# EAGLE board Sch (EAGLE 7.5.0)
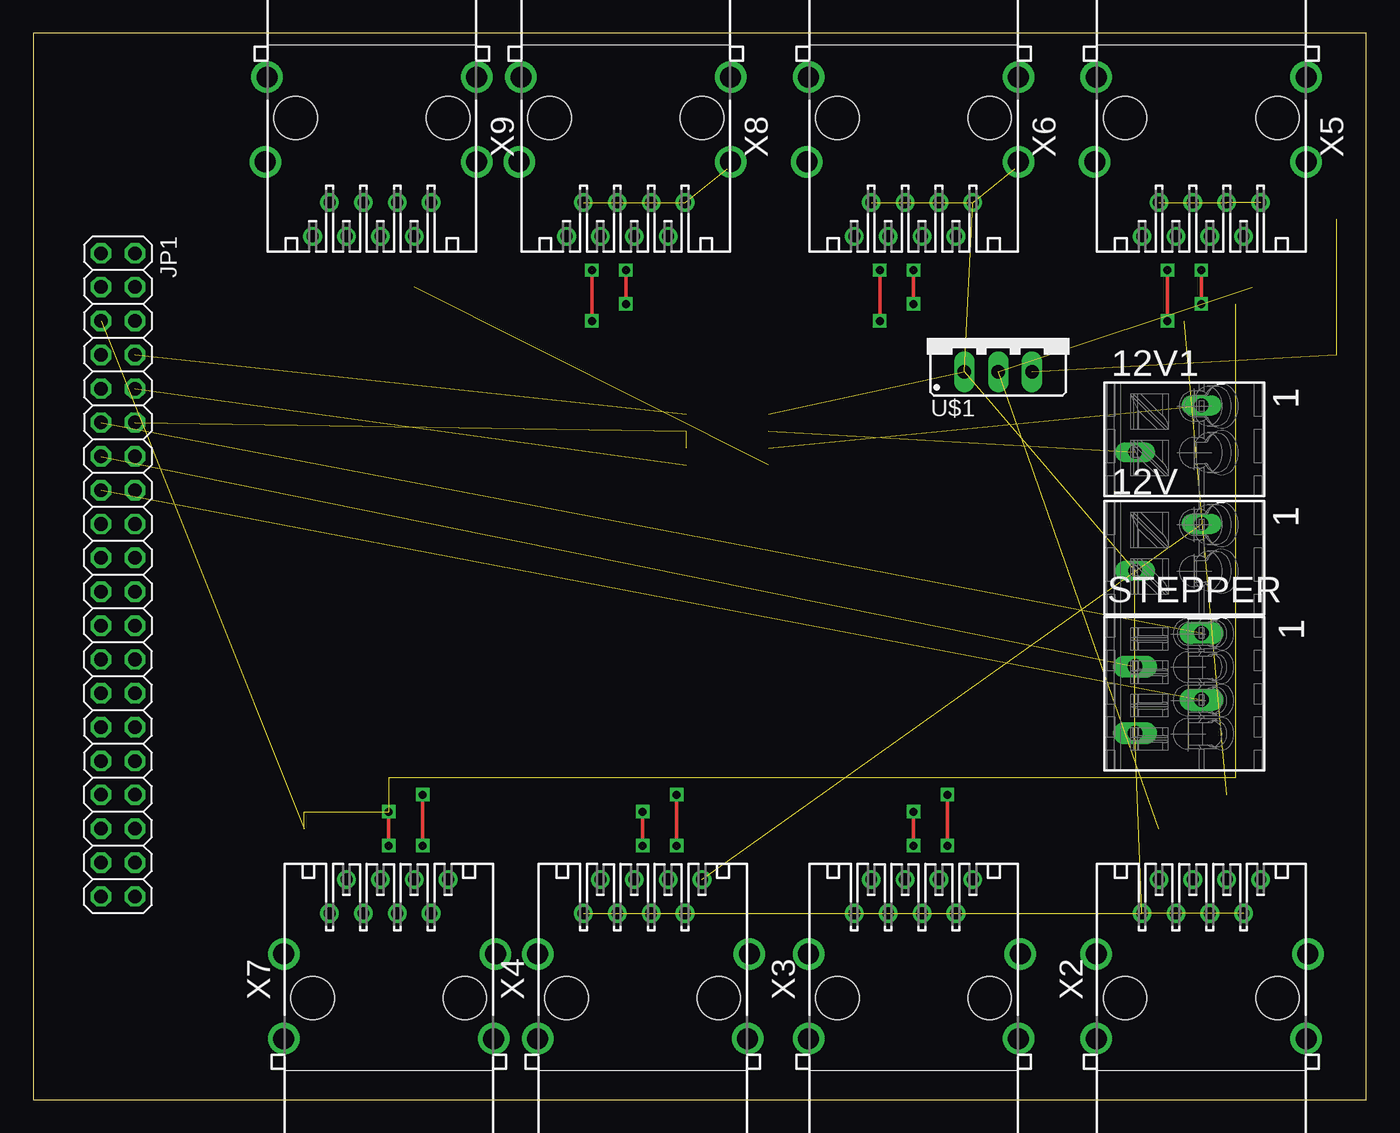
[diagram p0: board, top side]
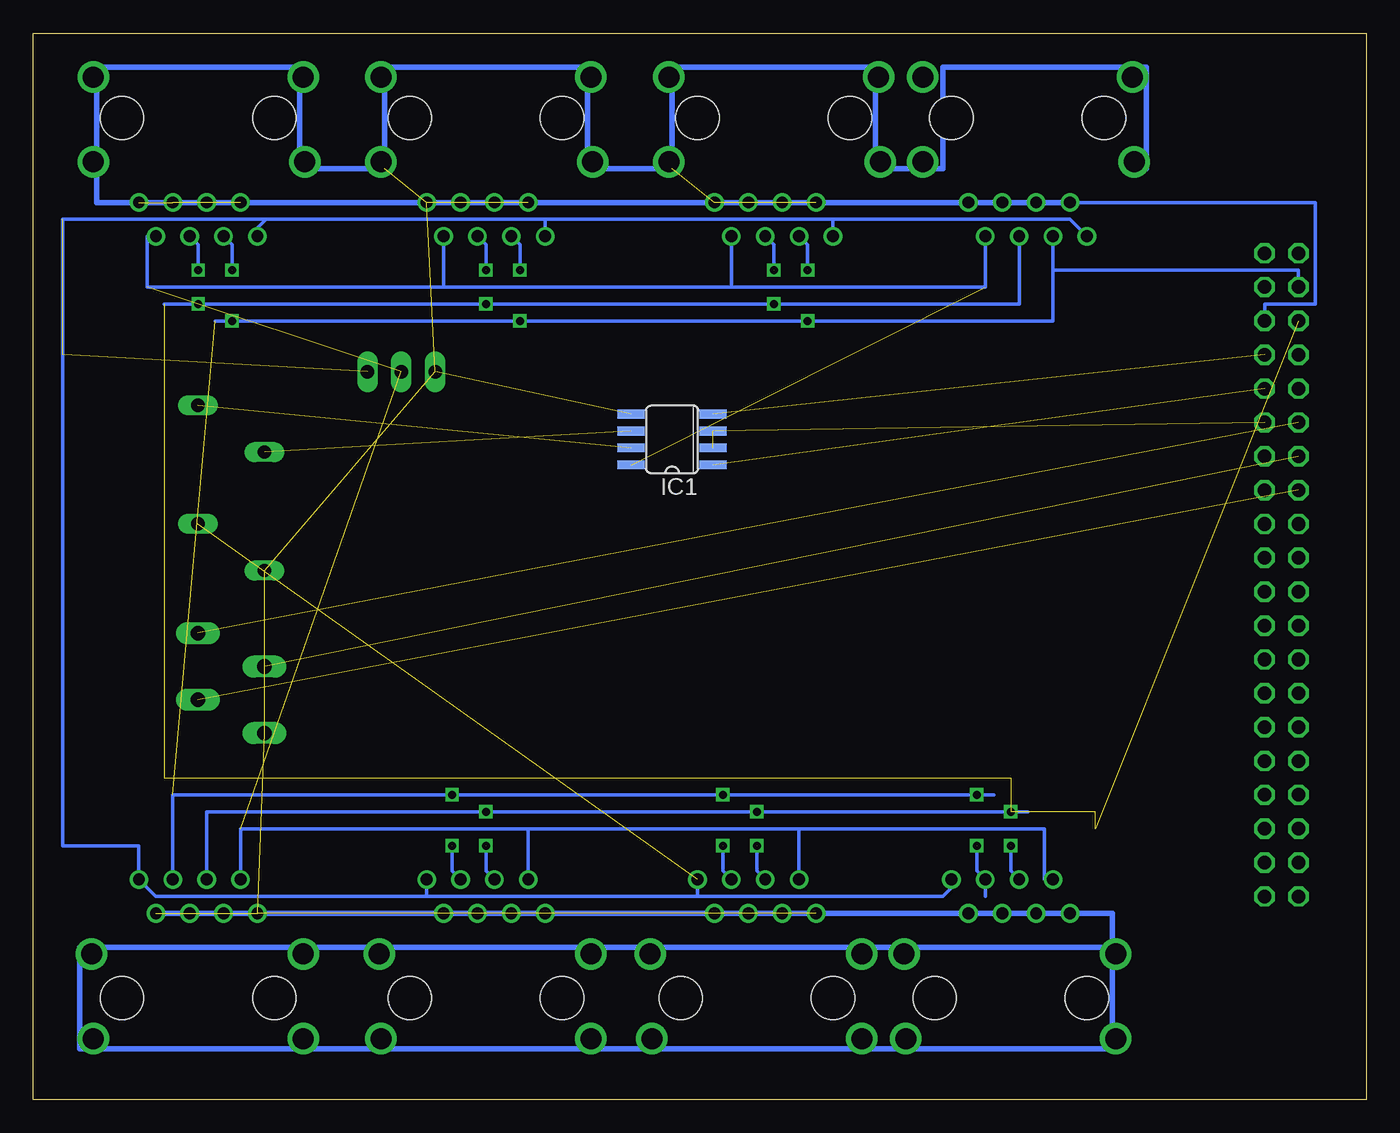
[diagram p1: board, bottom side, seen from below]

Size 100 x 80 mm. Coordinates in mm from the lower left corner, seen from the top.
Outline: 0,0 100,0 100,80 0,80 0,0
Copper layers (1*16): Top 0.035mm / dielectric 1.5mm / Bottom 0.035mm
Design rules "default": minimum track width 10mil, minimum drill 24mil, track to track 8mil, track to pad 8mil, pad to pad 8mil, via to via 8mil, smd to smd 8mil, copper to edge 40mil, drill to drill 8mil, minimum pad ring 10mil, minimum via ring 8mil, stop-mask expansion 4mil, vias tented up to drill 0mil, thermal gap 10mil

## Footprints (pad centres in the part's own frame; a part is rotated, then mirrored left to right if it is on the bottom)
P-250-202 = drill 1 long: L1 1.3,2.55; L2 -3.7,-0.95
SO08 = smd 0.66 x 2.032: 1 -1.905,-3.073; 2 -0.635,-3.073; 3 0.635,-3.073; 4 1.905,-3.073; 5 1.905,3.073; 6 0.635,3.073; 7 -0.635,3.073; 8 -1.905,3.073
2X20 = drill 1.016 octagon: 1 -24.13,-1.27; 2 -24.13,1.27; 3 -21.59,-1.27; 4 -21.59,1.27; 5 -19.05,-1.27; 6 -19.05,1.27; 7 -16.51,-1.27; 8 -16.51,1.27; 9 -13.97,-1.27; 10 -13.97,1.27; 11 -11.43,-1.27; 12 -11.43,1.27; 13 -8.89,-1.27; 14 -8.89,1.27; 15 -6.35,-1.27; 16 -6.35,1.27; 17 -3.81,-1.27; 18 -3.81,1.27; 19 -1.27,-1.27; 20 -1.27,1.27; 21 1.27,-1.27; 22 1.27,1.27; 23 3.81,-1.27; 24 3.81,1.27; 25 6.35,-1.27; 26 6.35,1.27; 27 8.89,-1.27; 28 8.89,1.27; 29 11.43,-1.27; 30 11.43,1.27; 31 13.97,-1.27; 32 13.97,1.27; 33 16.51,-1.27; 34 16.51,1.27; 35 19.05,-1.27; 36 19.05,1.27; 37 21.59,-1.27; 38 21.59,1.27; 39 24.13,-1.27; 40 24.13,1.27
P-250-404 = drill 1.1 long: L1 1.3,4.513; L2 -3.7,2.013; L3 1.3,-0.487; L4 -3.7,-2.987
TO220S = drill 1.016 long: 1 -2.54,-2.54; 2 0,-2.54; 3 2.54,-2.54
RJ45 = drill 0.889: 1 -4.445,6.35; 2 -3.175,8.89; 3 -1.905,6.35; 4 -0.635,8.89; 5 0.635,6.35; 6 1.905,8.89; 7 3.175,6.35; 8 4.445,8.89 | drill 1.575 pad 2.184: G1 -7.874,-3.048; G2 7.874,-3.048; G3 -7.874,3.302; G4 8.001,3.302 | hole 3.251: -5.715,0; 5.715,0

## Placement (x,y rotation side)
12V  250-202  [P-250-202]  86.36,40.64 0 top
12V1  250-202  [P-250-202]  86.36,49.53 0 top
IC1  MAX485CSA  [SO08]  52.07,49.53 90 bottom
JP1  [2X20]  6.35,39.37 270 top
STEPPER  250-404  [P-250-404]  86.36,30.48 0 top
U$1  LM1086TO220V  [TO220S]  72.39,57.15 0 top
X2  [RJ45]  87.63,7.62 0 top
X3  [RJ45]  66.04,7.62 0 top
X4  [RJ45]  45.72,7.62 0 top
X5  [RJ45]  87.63,73.66 180 top
X6  [RJ45]  66.04,73.66 180 top
X7  [RJ45]  26.67,7.62 0 top
X8  [RJ45]  44.45,73.66 180 top
X9  [RJ45]  25.4,73.66 180 top

## Library data of the parts
12V 12V1 STEPPER = con-wago_250
IC1 = andereBauteile
JP1 = pinhead-1
U$1 = v-reg-2
X2-X9 = con-appsys

## Nets
N$1: 12V.L2 IC1.5 JP1.6 STEPPER.L4 U$1.1 X2.1 X2.3 X2.5 X2.7 X3.1 X3.3 X3.5 X3.7 X4.1 X4.3 X4.5 X4.7 X5.1 X5.3 X5.5 X5.7 X6.1 X6.3 X6.5 X6.7 X7.1 X8.1 X8.3 X8.7 X9.7
N$2: JP1.3 X2.6 X3.6 X4.6 X5.6 X6.6 X7.6 X8.6 X9.6
N$3: JP1.5 X2.4 X3.4 X4.4 X5.4 X6.4 X7.4 X8.4 X9.4
N$4: 12V.L1 U$1.3 X2.8 X3.8 X4.8 X5.8 X6.8 X7.8 X8.8 X9.8
N$5: JP1.15 STEPPER.L3
N$6: JP1.11 STEPPER.L1
N$7: JP1.13 STEPPER.L2
N$8: IC1.8 U$1.2 X2.2 X3.2 X4.2 X5.2 X6.2 X7.2 X8.2 X9.2
N$9: IC1.2 IC1.3 JP1.12
N$10: IC1.1 JP1.10
N$11: IC1.4 JP1.8
N$12: 12V1.L2 IC1.6
N$13: 12V1.L1 IC1.7

## Tracks (layer width: path | path; a pad name or v marks a point on that pad's centre or on a via)
N$1  (26 unrouted)
  Bottom 0.254: JP1.6 7.62,59.69 3.81,59.69 3.81,67.31 22.86,67.31
  Bottom 0.406: X2.7 X7.1 19.05,13.97 19.05,11.43 | X9.7 22.86,67.31 X5.1 95.25,67.31 95.25,77.47 80.01,77.47 80.01,69.85 73.66,69.85 73.66,77.47 58.42,77.47 58.42,69.85 52.07,69.85 52.07,77.47 36.83,77.47 36.83,69.85 31.75,69.85 31.75,77.47 16.51,77.47 16.51,69.85 | 19.05,11.43 19.05,3.81 96.52,3.81 96.52,11.43 19.05,11.43
N$2  (via drill 0.6)  (7 unrouted)
  Top 0.254: v41.91,58.42 41.91,62.23 | v63.5,58.42 63.5,62.23 | v85.09,58.42 85.09,62.23 | v48.26,22.86 48.26,19.05 | v29.21,22.86 29.21,19.05 | v68.58,22.86 68.58,19.05
  Bottom 0.254: X9.6 23.5,62.23 | 23.5,62.23 23.5,58.42 v41.91,58.42 v63.5,58.42 v85.09,58.42 86.36,58.42 | X8.6 41.91,64.14 41.91,62.23 | X6.6 63.5,64.14 63.5,62.23 | X5.6 85.09,64.14 85.09,62.23 | X2.6 89.53,22.86 v68.58,22.86 v48.26,22.86 v29.21,22.86 27.94,22.86 | 29.21,19.05 29.21,17.14 X7.6 28.57,15.24 | X4.6 48.26,17.14 48.26,19.05 | X3.6 68.58,17.14 68.58,19.05 | JP1.3 5.08,62.23 23.5,62.23
N$3  (via drill 0.6)  (12 unrouted)
  Top 0.254: v66.04,59.69 66.04,62.23 | v87.63,59.69 87.63,62.23 | v44.45,59.69 44.45,62.23 | v45.72,21.59 45.72,19.05 | v26.67,21.59 26.67,19.05 | v66.04,21.59 66.04,19.05
  Bottom 0.254: X9.4 26.04,59.69 v44.45,59.69 v66.04,59.69 v87.63,59.69 | v87.63,59.69 88.9,59.69 | X8.4 44.45,64.14 44.45,62.23 | X6.4 66.04,64.14 66.04,62.23 | X5.4 87.63,64.14 87.63,62.23 | X2.4 87,21.59 v66.04,21.59 v45.72,21.59 v26.67,21.59 25.4,21.59 | X7.4 26.67,17.14 26.67,19.05 | X4.4 45.72,17.14 45.72,19.05 | X3.4 66.04,17.14 66.04,19.05 | v87.63,59.69 90.17,59.69
N$4  (3 unrouted)
  Bottom 0.254: X9.8 22.23,66.04 40.01,66.04 | 40.01,66.04 61.59,66.04 | 61.59,66.04 82.55,66.04 | 82.55,66.04 83.19,65.41 X5.8 | 61.59,66.04 X6.8 | X8.8 40.01,66.04 | 70.48,15.24 90.81,15.24 X2.8 92.08,19.05 97.79,19.05 97.79,66.04 82.55,66.04 | 70.48,15.24 50.16,15.24 | 50.16,15.24 31.75,15.24 31.11,15.88 X7.8 | X3.8 70.48,15.24 | X4.8 50.16,15.24
N$5  (1 unrouted)
N$6  (1 unrouted)
N$7  (1 unrouted)
N$8  (3 unrouted)
  Bottom 0.254: X9.2 28.57,60.96 47.62,60.96 | 47.62,60.96 69.22,60.96 | 69.22,60.96 91.44,60.96 91.44,64.77 X5.2 | X8.2 47.62,60.96 | X6.2 69.22,60.96 | X2.2 84.45,20.32 62.87,20.32 | 62.87,20.32 42.55,20.32 | 42.55,20.32 24.13,20.32 24.13,16.51 X7.2 | X4.2 42.55,20.32 | X3.2 62.87,20.32
N$9  (2 unrouted)
N$10  (1 unrouted)
N$11  (1 unrouted)
N$12  (1 unrouted)
N$13  (1 unrouted)
N$16  (via drill 0.6)
  other vias: 44.45,62.23
N$17  (via drill 0.6)
  other vias: 41.91,62.23
N$19  (via drill 0.6)
  other vias: 63.5,62.23
N$20  (via drill 0.6)
  other vias: 66.04,62.23
N$21  (via drill 0.6)
  other vias: 87.63,62.23
N$22  (via drill 0.6)
  other vias: 85.09,62.23
N$24  (via drill 0.6)
  other vias: 68.58,19.05
N$25  (via drill 0.6)
  other vias: 66.04,19.05
N$26  (via drill 0.6)
  other vias: 48.26,19.05
N$27  (via drill 0.6)
  other vias: 45.72,19.05
N$28  (via drill 0.6)
  other vias: 29.21,19.05
N$29  (via drill 0.6)
  other vias: 26.67,19.05